# Altium PCB PCB_Output register_2021-10-31.pcbdoc
Units mm, origin at the board's own origin, x right, y up, seen from the top; angles counter-clockwise.
Board outline 124.59 x 83.95 mm, 2 copper layers (Top Layer, Bottom Layer); 27 components, 33 nets, 96 pads, 16 vias.
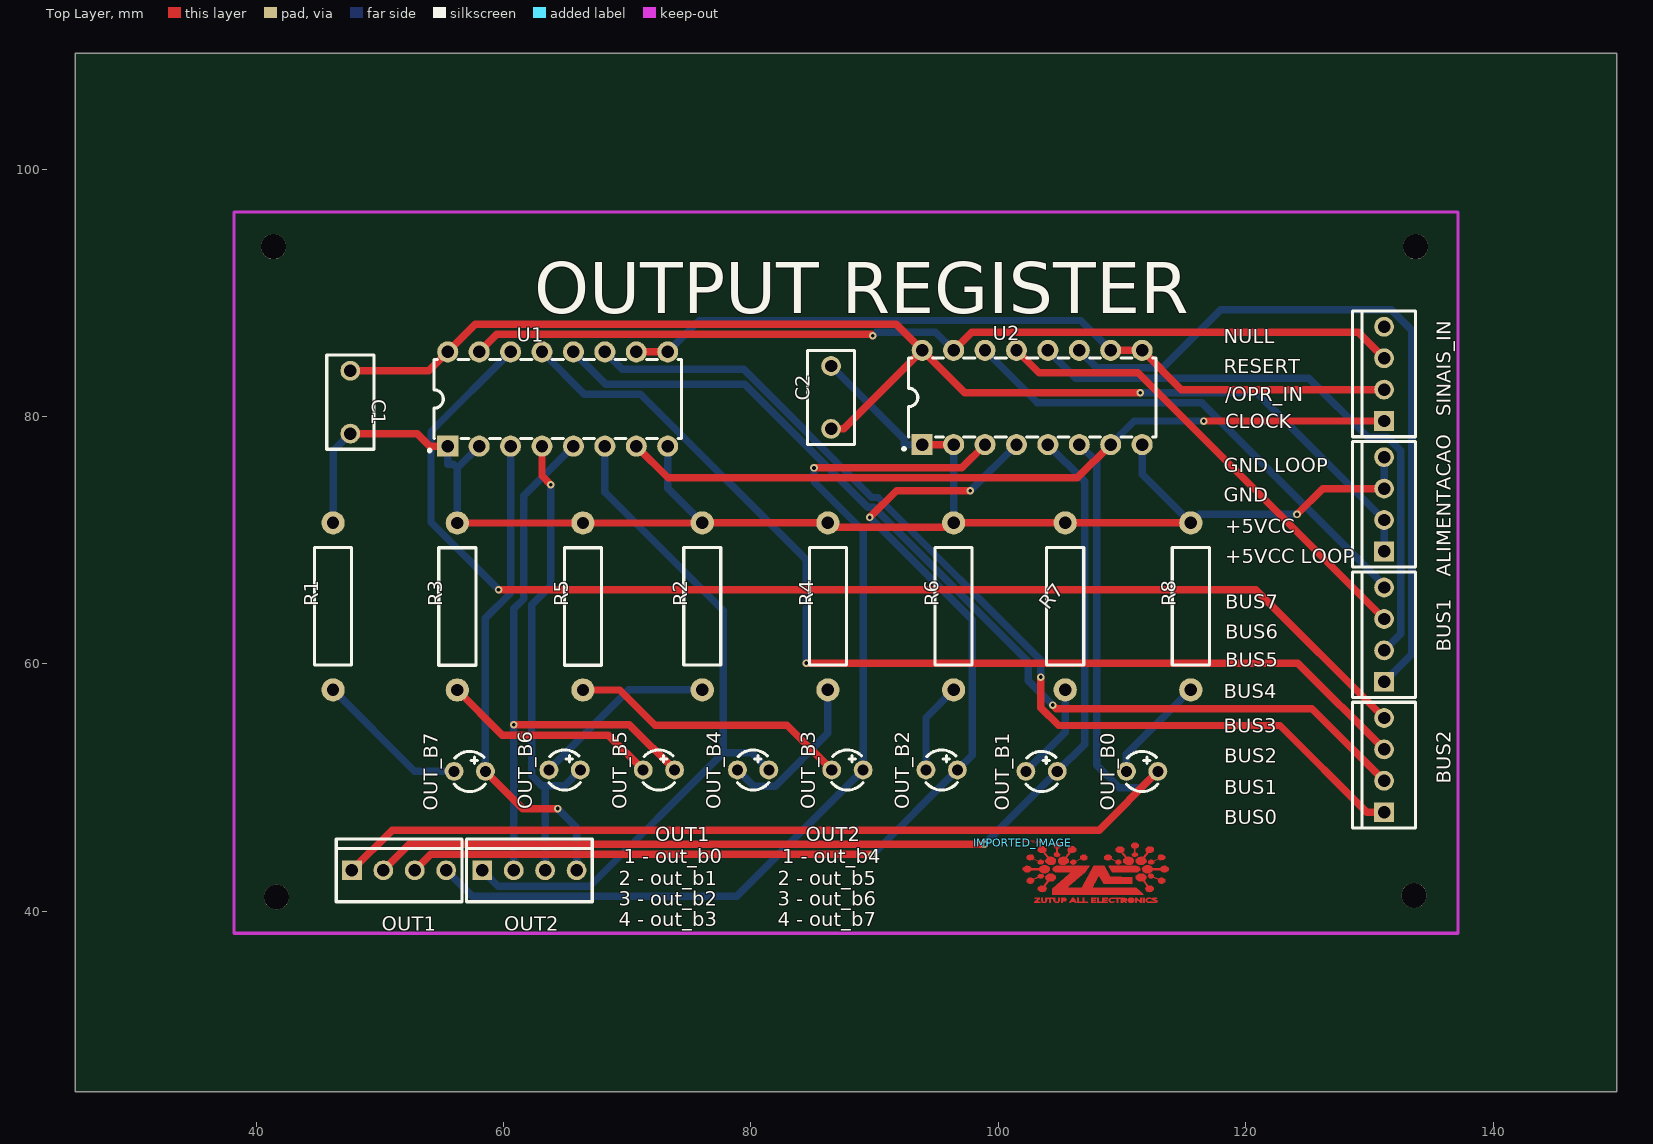
[diagram p0: Top Layer view]
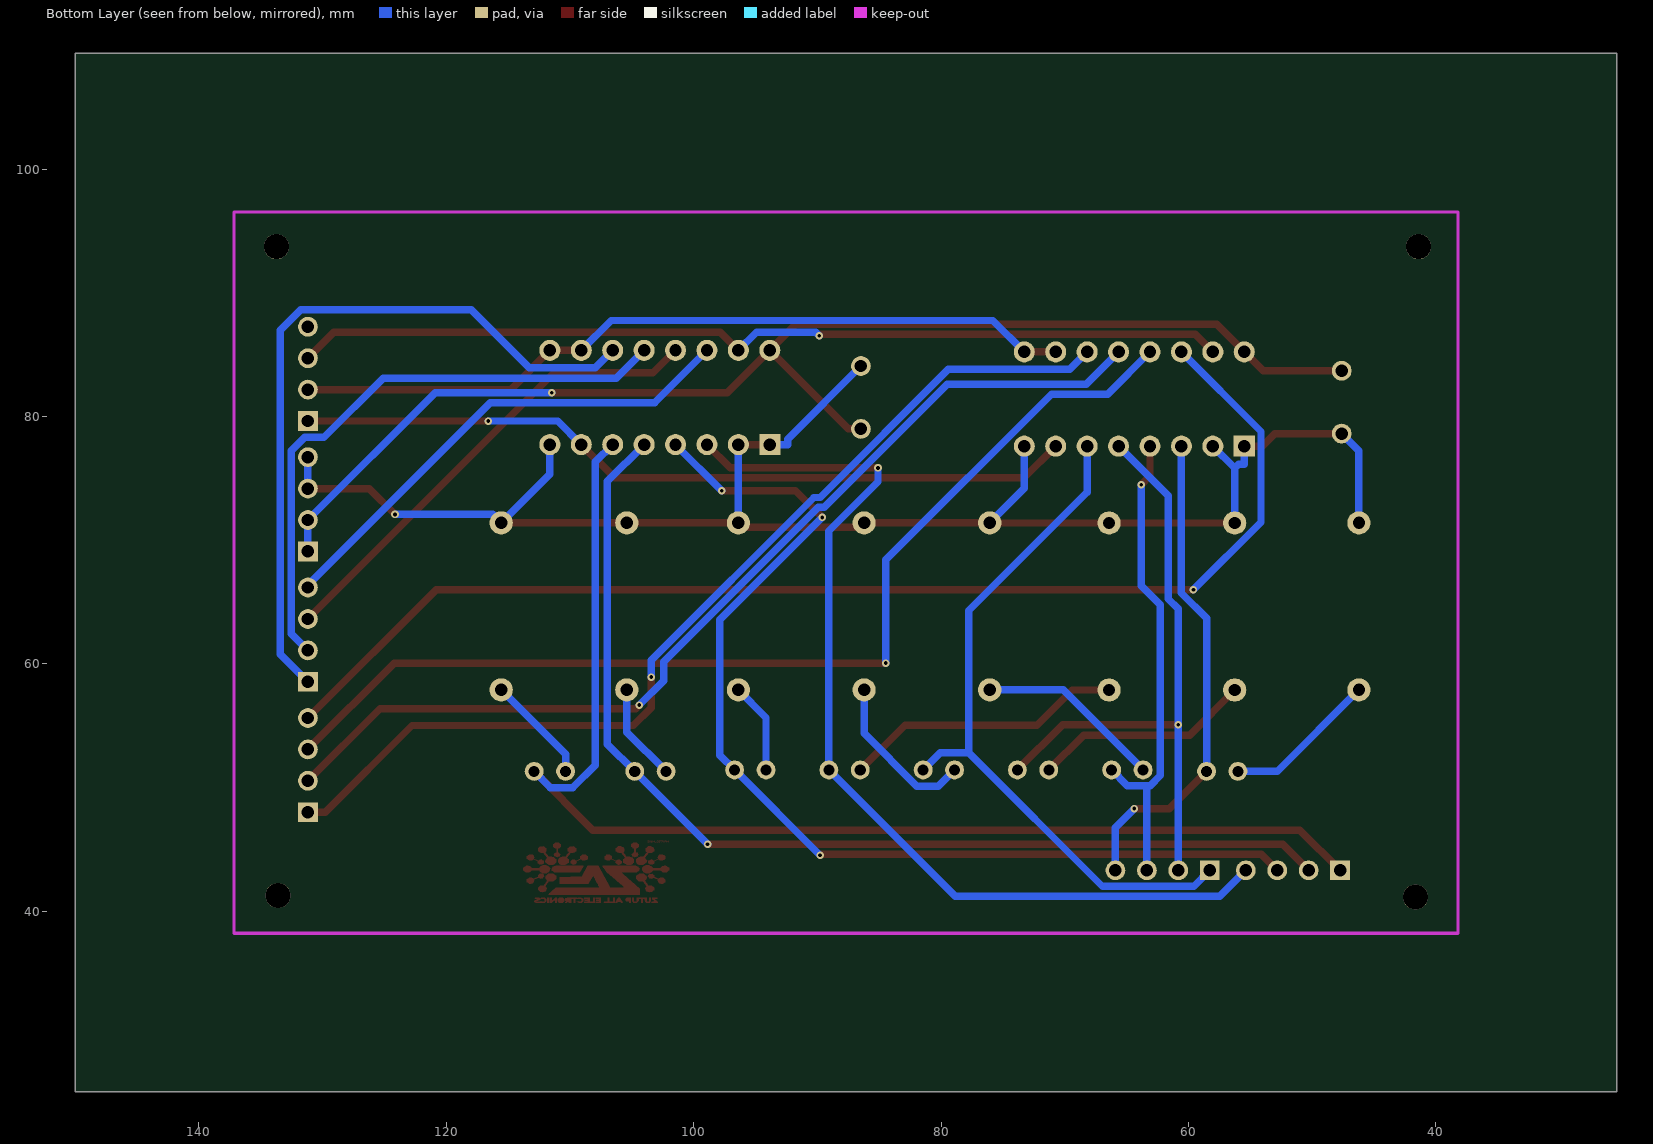
[diagram p1: Bottom Layer view, seen from below]

## Layer stack, top to bottom
Top Layer: signal copper (thickness not stored)
Dielectric: dielectric 0.32, FR-4, Dk 4.8
Bottom Layer: signal copper (thickness not stored)

## Board outline
149.987,25.4 25.4,25.4 25.4,109.347 149.987,109.347

## Components (designator, comment, footprint, x,y, rotation, side; value= is the part's Value field where it differs from the comment)
ALIMENTACAO "ALIM." HDR-TH_4P-P2.54-D1.0 131.191,72.898 r90 top
BUS1 "BUS1" HDR-TH_4P-P2.54-D1.0 131.191,62.357 r90 top
BUS2 "BUS2" HDR-TH_4P-P2.54-D1.0 131.191,51.816 r90 top
C1 "100nF 63V poli7" CAP-TH_L7.6-W3.8-P5.08-D0.51 47.625,81.153 r270 top
C2 "100nF 63V poli" CAP-TH_L7.6-W3.8-P5.08-D0.51 86.487,81.534 r90 top
IMPORTED_IMAGE "IMPORTED_IMAGE" IMPORTED_IMAGE 101.999,45.529 r0 top
OUT1 "OUT1" HDR-TH_4P-P2.54-D1.0 51.562,43.307 r0 top
OUT2 "OUT2" HDR-TH_4P-P2.54-D1.0 62.103,43.307 r0 top
OUT_B0 "VERDE" LED-TH_BD3.0-P2.54-RD-GREEN 111.633,51.308 r0 top
OUT_B1 "VERDE" LED-TH_BD3.0-P2.54-RD-GREEN 103.505,51.308 r0 top
OUT_B2 "VERDE" LED-TH_BD3.0-P2.54-RD-GREEN 95.428,51.425 r0 top
OUT_B3 "VERDE" LED-TH_BD3.0-P2.54-RD-GREEN 87.808,51.425 r0 top
OUT_B4 "VERDE" LED-TH_BD3.0-P2.54-RD-GREEN 80.188,51.425 r0 top
OUT_B5 "VERDE" LED-TH_BD3.0-P2.54-RD-GREEN 72.568,51.425 r0 top
OUT_B6 "VERDE" LED-TH_BD3.0-P2.54-RD-GREEN 64.948,51.425 r0 top
OUT_B7 "VERDE" LED-TH_BD3.0-P2.54-RD-GREEN 57.277,51.308 r0 top
R1 "150" RES-TH_BD3.0-L9.5-P13.50-D0.6 46.228,64.643 r90 top
R2 "150" RES-TH_BD3.0-L9.5-P13.50-D0.6 76.073,64.643 r90 top
R3 "150" RES-TH_BD3.0-L9.5-P13.50-D0.6 56.271,64.637 r90 top
R4 "150" RES-TH_BD3.0-L9.5-P13.50-D0.6 86.233,64.643 r90 top
R5 "150" RES-TH_BD3.0-L9.5-P13.50-D0.6 66.431,64.637 r90 top
R6 "150" RES-TH_BD3.0-L9.5-P13.50-D0.6 96.393,64.643 r90 top
R7 "150" RES-TH_BD3.0-L9.5-P13.50-D0.6 105.41,64.643 r90 top
R8 "150" RES-TH_BD3.0-L9.5-P13.50-D0.6 115.57,64.643 r90 top
SINAIS_IN "SINAIS IN" HDR-TH_4P-P2.54-D1.0 131.191,83.439 r90 top
U1 "SN74LS173AN" PDIP-16_L19.7-W6.6-P2.54-LS7.6-BL 64.389,81.406 r0 top
U2 "SN74LS173AN" PDIP-16_L19.7-W6.6-P2.54-LS7.6-BL 102.743,81.533 r0 top

## Footprints (in the part's own frame and the unit in brackets; to place one, negate y for a bottom-side part, rotate by r counter-clockwise, add the part's x,y. Pads: shape width x height; smd on the part's side, far side on the other; paste and mask are expansions set on the pad)
CAP-TH_L7.6-W3.8-P5.08-D0.51 [mm]
  round 1.6 hole 1: 1(-2.54,0) 2(2.54,0)
  silkscreen extent -3.81,-1.91 3.81,1.91
HDR-TH_4P-P2.54-D1.0 [mm]
  rect 1.6x1.6 hole 1: 1(-3.81,0)
  round 1.6 hole 1: 2(-1.27,0) 3(1.27,0) 4(3.81,0)
  silkscreen extent -5.08,-2.54 5.08,2.54
IMPORTED_IMAGE [mm]
  Top Layer region: 1.407,-4.796 1.424,-4.835 0.917,-4.835 0.917,-4.805 0.918,-4.801 0.92,-4.796 0.923,-4.791 0.927,-4.784 0.932,-4.777 0.939,-4.769 0.946,-4.761 0.954,-4.752 0.963,-4.742 0.972,-4.732 0.983,-4.722 0.994,-4.711 1.005,-4.7 1.017,-4.689 1.03,-4.678 1.042,-4.667 1.069,-4.644 1.092,-4.623 1.112,-4.605 1.128,-4.589 1.141,-4.575 1.151,-4.563 1.157,-4.553 1.16,-4.545 1.159,-4.538 1.155,-4.533 1.148,-4.529 1.138,-4.525 1.124,-4.523 1.107,-4.522 1.087,-4.521 1.063,-4.521 0.959,-4.521 0.959,-4.427 1.376,-4.427 1.376,-4.471 1.375,-4.476 1.374,-4.482 1.371,-4.489 1.368,-4.496 1.363,-4.504 1.358,-4.512 1.352,-4.521 1.345,-4.53 1.338,-4.54 1.33,-4.55 1.321,-4.56 1.312,-4.57 1.302,-4.58 1.293,-4.59 1.282,-4.6 1.272,-4.609 1.249,-4.63 1.229,-4.648 1.212,-4.664 1.199,-4.678 1.188,-4.69 1.181,-4.701 1.176,-4.71 1.175,-4.717 1.177,-4.723 1.182,-4.728 1.19,-4.733 1.202,-4.736 1.216,-4.739 1.234,-4.742 1.255,-4.744 1.279,-4.746 1.39,-4.756
  Top Layer region: 2.59,-4.835 2.525,-4.765 2.46,-4.695 2.46,-4.427 2.627,-4.427 2.627,-4.737 2.714,-4.777 2.835,-4.702 2.835,-4.427 2.96,-4.427 2.96,-4.713 2.917,-4.774 2.874,-4.835
  Top Layer region: 2.251,-4.678 2.251,-4.835 2.126,-4.835 2.126,-4.521 1.97,-4.521 1.946,-4.634 1.94,-4.657 1.933,-4.681 1.924,-4.704 1.915,-4.726 1.904,-4.747 1.894,-4.764 1.883,-4.779 1.873,-4.791 1.824,-4.835 1.546,-4.835 1.459,-4.713 1.459,-4.427 1.584,-4.427 1.584,-4.702 1.706,-4.777 1.793,-4.737 1.793,-4.427 2.418,-4.427 2.418,-4.521 2.251,-4.521
  Top Layer region: 7.588,-4.835 7.588,-4.527 7.093,-4.527 7.044,-4.624 7.067,-4.679 7.073,-4.691 7.082,-4.702 7.092,-4.714 7.103,-4.724 7.116,-4.734 7.129,-4.742 7.143,-4.749 7.157,-4.754 7.223,-4.773 7.271,-4.743 7.32,-4.713 7.381,-4.742 7.442,-4.772 7.379,-4.803 7.372,-4.806 7.364,-4.809 7.355,-4.812 7.345,-4.815 7.335,-4.818 7.324,-4.82 7.312,-4.823 7.299,-4.825 7.287,-4.827 7.274,-4.829 7.26,-4.83 7.247,-4.832 7.234,-4.833 7.221,-4.834 7.208,-4.834 7.195,-4.834 7.073,-4.835 6.921,-4.731 6.921,-4.524 7.106,-4.427 7.321,-4.427 7.371,-4.464 7.421,-4.502 7.421,-4.427 7.88,-4.427 7.88,-4.521 7.713,-4.521 7.713,-4.835
  Top Layer region: 5.503,-4.835 5.503,-4.427 5.92,-4.427 5.92,-4.521 5.628,-4.521 5.628,-4.584 5.878,-4.584 5.878,-4.678 5.628,-4.678 5.628,-4.741 5.92,-4.741 5.92,-4.835
  Top Layer region: 9.089,-4.835 9.089,-4.427 9.193,-4.427 9.327,-4.544 9.461,-4.662 9.464,-4.427 9.589,-4.427 9.589,-4.835 9.47,-4.835 9.214,-4.601 9.214,-4.835
  Top Layer region: 3.21,-4.79 3.21,-4.835 3.085,-4.835 3.085,-4.427 3.207,-4.427 3.237,-4.427 3.265,-4.428 3.291,-4.43 3.316,-4.432 3.339,-4.435 3.36,-4.439 3.38,-4.444 3.399,-4.449 3.416,-4.456 3.432,-4.463 3.446,-4.471 3.46,-4.48 3.473,-4.489 3.484,-4.5 3.495,-4.512 3.505,-4.525 3.547,-4.584 3.461,-4.704 3.336,-4.725 3.21,-4.746 hole: 1051991.909,409386.215 1051991.909,408735.213 1051991.909,408735.213 1053441.487,408945.525 1053441.487,408945.525 1053580.933,409491.371 1053580.933,409491.371 1053720.887,410037.217 1053720.887,410037.217 1051991.909,410037.217 1051991.909,410037.217 1051991.909,409386.215
  Top Layer region: 6.003,-4.835 6.003,-4.427 6.129,-4.427 6.129,-4.741 6.379,-4.741 6.379,-4.835
  Top Layer region: 8.94,-4.786 8.874,-4.835 8.594,-4.835 8.463,-4.736 8.463,-4.542 8.532,-4.484 8.601,-4.427 8.867,-4.427 8.932,-4.482 8.951,-4.499 8.968,-4.517 8.981,-4.536 8.993,-4.556 9.002,-4.576 9.009,-4.597 9.013,-4.618 9.015,-4.638 9.014,-4.659 9.011,-4.679 9.005,-4.699 8.997,-4.718 8.986,-4.737 8.973,-4.754 8.958,-4.77 hole: 1106394.645,407959.751 1107138.865,407549.795 1107138.865,407549.795 1107940.235,407872.375 1107940.235,407872.375 1108741.351,408195.463 1108741.351,408195.463 1108612.319,409037.727 1108612.319,409037.727 1108482.779,409880.245 1108482.779,409880.245 1107350.955,409978.035 1107350.955,409978.035 1106219.131,410076.587 1106219.131,410076.587 1105934.651,409222.893 1105934.651,409222.893 1105650.171,408369.707 1105650.171,408369.707 1106394.645,407959.751
  Top Layer region: 3.904,-4.788 3.88,-4.835 3.743,-4.835 3.768,-4.791 3.8,-4.733 3.851,-4.642 3.972,-4.427 4.112,-4.427 4.254,-4.678 4.315,-4.787 4.343,-4.835 4.169,-4.835 4.169,-4.741 3.928,-4.741 hole: 1059912.899,408938.159 1059912.899,408467.243 1059912.899,408467.243 1060747.035,408467.243 1060747.035,408467.243 1060747.035,409409.329 1060747.035,409409.329 1059912.899,409409.329 1059912.899,409409.329 1059912.899,408938.159
  Top Layer region: 7.921,-4.835 7.921,-4.427 8.219,-4.427 8.38,-4.492 8.38,-4.674 8.289,-4.716 8.335,-4.75 8.352,-4.766 8.367,-4.782 8.376,-4.797 8.38,-4.81 8.379,-4.817 8.375,-4.823 8.369,-4.828 8.362,-4.831 8.352,-4.834 8.342,-4.835 8.33,-4.835 8.317,-4.833 8.304,-4.831 8.29,-4.828 8.276,-4.823 8.262,-4.818 8.249,-4.812 8.236,-4.805 8.224,-4.797 8.213,-4.788 8.19,-4.769 8.166,-4.755 8.143,-4.744 8.125,-4.741 8.088,-4.741 8.088,-4.835 hole: 1100770.069,409409.329 1100770.069,408735.213 1100770.069,408735.213 1101499.811,408840.877 1101499.811,408840.877 1102229.553,408946.795 1102229.553,408946.795 1102229.553,409871.355 1102229.553,409871.355 1101499.811,409977.019 1101499.811,409977.019 1100770.069,410083.191 1100770.069,410083.191 1100770.069,409409.329
  Top Layer region: 4.794,-4.788 4.794,-4.835 4.378,-4.835 4.378,-4.427 4.503,-4.427 4.503,-4.741 4.794,-4.741
  Top Layer region: 9.672,-4.835 9.672,-4.427 9.839,-4.427 9.839,-4.835
  Top Layer region: 4.836,-4.835 4.836,-4.427 4.961,-4.427 4.961,-4.737 5.094,-4.747 5.226,-4.756 5.26,-4.835
  Top Layer region: 6.837,-4.788 6.837,-4.835 6.42,-4.835 6.42,-4.427 6.837,-4.427 6.837,-4.521 6.587,-4.521 6.587,-4.584 6.844,-4.584 6.827,-4.623 6.81,-4.662 6.699,-4.672 6.587,-4.682 6.587,-4.741 6.837,-4.741
  Top Layer region: 10.842,-4.786 10.793,-4.83 10.419,-4.829 10.044,-4.828 9.922,-4.736 9.922,-4.542 9.991,-4.484 10.06,-4.427 10.329,-4.427 10.422,-4.511 10.397,-4.53 10.371,-4.549 10.247,-4.531 10.122,-4.512 10.086,-4.556 10.071,-4.577 10.059,-4.602 10.051,-4.629 10.048,-4.653 10.048,-4.707 10.134,-4.742 10.22,-4.776 10.326,-4.71 10.355,-4.732 10.359,-4.734 10.364,-4.736 10.371,-4.738 10.379,-4.741 10.389,-4.743 10.399,-4.745 10.411,-4.747 10.424,-4.749 10.438,-4.751 10.452,-4.752 10.467,-4.754 10.483,-4.756 10.499,-4.757 10.515,-4.758 10.532,-4.759 10.549,-4.76 10.715,-4.766 10.736,-4.74 10.757,-4.714 10.614,-4.679 10.472,-4.644 10.449,-4.598 10.425,-4.552 10.474,-4.458 10.57,-4.439 10.617,-4.432 10.661,-4.429 10.702,-4.429 10.739,-4.433 10.771,-4.441 10.798,-4.451 10.817,-4.465 10.829,-4.482 10.847,-4.521 10.589,-4.521 10.589,-4.545 10.59,-4.548 10.592,-4.551 10.595,-4.554 10.599,-4.558 10.605,-4.561 10.611,-4.565 10.618,-4.569 10.626,-4.573 10.635,-4.577 10.645,-4.581 10.655,-4.586 10.666,-4.59 10.677,-4.594 10.689,-4.598 10.702,-4.602 10.714,-4.605 10.839,-4.641 10.891,-4.741
  Top Layer region: 2.376,-4.176 2.378,-3.948 2.379,-3.72 3.106,-3.077 3.252,-2.947 3.388,-2.825 3.512,-2.713 3.62,-2.615 3.709,-2.533 3.776,-2.469 3.819,-2.427 3.834,-2.41 3.836,-2.386 2.599,-2.386 2.514,-2.315 2.496,-2.3 2.478,-2.283 2.461,-2.264 2.445,-2.245 2.43,-2.226 2.417,-2.208 2.407,-2.191 2.4,-2.176 2.372,-2.107 2.439,-2.009 2.506,-1.912 2.689,-1.856 4.034,-1.854 4.171,-1.854 4.304,-1.854 4.432,-1.854 4.556,-1.855 4.673,-1.855 4.784,-1.856 4.888,-1.857 4.983,-1.858 5.07,-1.859 5.148,-1.86 5.215,-1.861 5.272,-1.862 5.317,-1.864 5.351,-1.865 5.371,-1.867 5.378,-1.869 5.376,-1.874 5.371,-1.884 5.362,-1.9 5.35,-1.919 5.335,-1.943 5.318,-1.97 5.299,-2 5.278,-2.032 5.255,-2.067 5.23,-2.103 5.214,-2.128 5.049,-2.37 4.317,-2.992 4.17,-3.117 4.033,-3.234 3.909,-3.341 3.8,-3.435 3.711,-3.513 3.643,-3.573 3.6,-3.612 3.585,-3.627 3.588,-3.629 3.597,-3.63 3.616,-3.632 3.642,-3.634 3.676,-3.635 3.717,-3.637 3.764,-3.638 3.817,-3.639 3.874,-3.64 3.937,-3.641 4.003,-3.641 4.058,-3.642 4.116,-3.642 4.16,-3.642 4.734,-3.642 5.233,-2.747 5.733,-1.853 6.151,-1.853 6.57,-1.852 6.819,-2.3 7.068,-2.747 7.953,-2.756 8.838,-2.764 8.838,-3.296 6.517,-3.296 6.337,-2.983 6.3,-2.919 6.265,-2.861 6.231,-2.807 6.201,-2.761 6.175,-2.722 6.153,-2.693 6.137,-2.675 6.127,-2.669 6.117,-2.679 6.098,-2.708 6.072,-2.753 6.039,-2.812 6,-2.881 5.958,-2.959 5.914,-3.043 5.868,-3.13 5.823,-3.217 5.78,-3.303 5.739,-3.384 5.703,-3.457 5.672,-3.521 5.649,-3.572 5.634,-3.608 5.628,-3.627 5.635,-3.628 5.656,-3.63 5.69,-3.631 5.736,-3.632 5.794,-3.633 5.863,-3.634 5.955,-3.636 6.06,-3.637 6.177,-3.638 6.305,-3.639 6.443,-3.639 6.572,-3.64 6.707,-3.641 6.848,-3.641 6.995,-3.641 7.146,-3.642 7.301,-3.642 7.392,-3.642 9.155,-3.642 9.434,-3.883 9.491,-3.932 9.543,-3.978 9.59,-4.022 9.632,-4.06 9.666,-4.094 9.692,-4.12 9.708,-4.139 9.714,-4.15 9.714,-4.176
  Top Layer region: 1.701,-3.943 1.58,-3.99 1.488,-3.97 1.468,-3.964 1.445,-3.956 1.421,-3.947 1.396,-3.936 1.371,-3.924 1.346,-3.911 1.324,-3.897 1.303,-3.884 1.209,-3.819 1.209,-3.619 1.295,-3.536 1.382,-3.453 1.663,-3.453 1.807,-3.261 1.951,-3.069 1.867,-2.962 1.784,-2.856 1.81,-2.75 1.836,-2.644 1.945,-2.562 2.054,-2.48 2.425,-2.48 2.546,-2.572 2.668,-2.664 2.668,-2.919 2.549,-3.019 2.429,-3.12 2.254,-3.124 2.078,-3.127 1.943,-3.317 1.809,-3.507 1.869,-3.604 1.93,-3.7 1.876,-3.798 1.823,-3.896
  Top Layer region: 10.214,-3.989 10.095,-3.942 9.976,-3.896 9.922,-3.798 9.868,-3.7 9.93,-3.603 9.991,-3.505 9.709,-3.122 9.372,-3.122 9.251,-3.021 9.13,-2.919 9.13,-2.664 9.252,-2.572 9.374,-2.48 9.744,-2.48 9.852,-2.561 9.959,-2.642 9.986,-2.735 10.013,-2.828 9.932,-2.951 9.852,-3.074 10.136,-3.453 10.417,-3.453 10.503,-3.536 10.589,-3.619 10.589,-3.79 10.507,-3.87 10.424,-3.949
  Top Layer region: 0.512,-3.296 0.292,-3.166 0.292,-2.971 0.382,-2.898 0.473,-2.826 0.69,-2.826 0.776,-2.871 0.861,-2.916 1.035,-2.837 1.209,-2.759 1.209,-2.61 1.277,-2.559 1.345,-2.508 1.475,-2.518 1.605,-2.527 1.66,-2.615 1.716,-2.703 1.651,-2.778 1.586,-2.852 1.504,-2.872 1.421,-2.892 1.332,-2.856 1.243,-2.82 1.059,-2.893 0.876,-2.966 0.899,-3.02 0.922,-3.074 0.795,-3.257 0.728,-3.277 0.713,-3.281 0.696,-3.285 0.677,-3.288 0.658,-3.291 0.639,-3.293 0.62,-3.295 0.602,-3.296 0.586,-3.296
  Top Layer region: 11.397,-3.231 11.287,-3.296 11.213,-3.296 11.196,-3.296 11.178,-3.295 11.16,-3.293 11.14,-3.291 11.121,-3.288 11.103,-3.285 11.086,-3.281 11.071,-3.277 11.003,-3.257 10.877,-3.074 10.922,-2.966 10.739,-2.893 10.556,-2.82 10.467,-2.856 10.378,-2.892 10.295,-2.872 10.212,-2.852 10.15,-2.78 10.087,-2.709 10.116,-2.649 10.122,-2.637 10.13,-2.623 10.138,-2.61 10.147,-2.596 10.157,-2.583 10.166,-2.571 10.175,-2.56 10.184,-2.551 10.224,-2.512 10.458,-2.512 10.524,-2.561 10.589,-2.61 10.589,-2.759 10.764,-2.837 10.938,-2.916 11.108,-2.826 11.314,-2.826 11.41,-2.894 11.507,-2.962 11.507,-3.166
  Top Layer region: 9.885,-2.449 9.776,-2.378 9.667,-2.307 9.643,-2.175 9.62,-2.042 9.762,-1.879 9.91,-1.83 9.937,-1.821 9.962,-1.814 9.973,-1.81 9.984,-1.807 9.994,-1.805 10.004,-1.802 10.013,-1.8 10.022,-1.798 10.03,-1.797 10.039,-1.796 10.047,-1.795 10.055,-1.794 10.063,-1.794 10.071,-1.794 10.079,-1.795 10.087,-1.795 10.096,-1.797 10.104,-1.798 10.113,-1.8 10.123,-1.802 10.132,-1.804 10.143,-1.807 10.153,-1.81 10.165,-1.813 10.19,-1.82 10.218,-1.829 10.375,-1.879 10.442,-1.975 10.508,-2.072 11.131,-2.072 11.131,-2.03 11.132,-2.024 11.133,-2.018 11.135,-2.012 11.138,-2.006 11.141,-1.999 11.145,-1.993 11.149,-1.987 11.155,-1.981 11.161,-1.974 11.167,-1.968 11.174,-1.962 11.182,-1.956 11.19,-1.95 11.198,-1.944 11.207,-1.938 11.217,-1.932 11.226,-1.926 11.237,-1.921 11.247,-1.916 11.258,-1.91 11.269,-1.905 11.281,-1.9 11.293,-1.896 11.305,-1.891 11.317,-1.887 11.33,-1.883 11.343,-1.88 11.355,-1.876 11.368,-1.873 11.382,-1.87 11.395,-1.868 11.408,-1.866 11.533,-1.847 11.666,-1.931 11.799,-2.015 11.799,-2.232 11.696,-2.309 11.594,-2.386 11.314,-2.386 11.223,-2.322 11.187,-2.295 11.158,-2.268 11.139,-2.245 11.131,-2.228 11.131,-2.198 10.508,-2.198 10.444,-2.291 10.38,-2.384 10.3,-2.416 10.22,-2.449
  Top Layer region: 1.579,-2.449 1.499,-2.416 1.418,-2.384 1.354,-2.291 1.29,-2.198 0.703,-2.198 0.493,-2.386 0.205,-2.386 0.102,-2.309 0,-2.232 0,-2.015 0.265,-1.847 0.39,-1.866 0.443,-1.876 0.494,-1.891 0.54,-1.91 0.582,-1.932 0.617,-1.956 0.644,-1.981 0.661,-2.006 0.667,-2.03 0.667,-2.072 1.29,-2.072 1.357,-1.976 1.423,-1.879 1.571,-1.831 1.599,-1.822 1.623,-1.814 1.635,-1.81 1.645,-1.807 1.655,-1.805 1.665,-1.802 1.674,-1.8 1.683,-1.798 1.692,-1.797 1.7,-1.796 1.708,-1.795 1.716,-1.794 1.724,-1.794 1.732,-1.794 1.74,-1.795 1.748,-1.795 1.757,-1.796 1.765,-1.798 1.774,-1.799 1.783,-1.801 1.793,-1.804 1.803,-1.806 1.814,-1.809 1.825,-1.812 1.85,-1.82 1.878,-1.829 2.032,-1.877 2.168,-2.023 2.168,-2.201 2.042,-2.384 1.962,-2.416 1.882,-2.449
  Top Layer region: 9.373,-2.313 9.283,-2.386 7.215,-2.386 7.068,-2.146 7.038,-2.097 7.011,-2.051 6.986,-2.008 6.964,-1.969 6.946,-1.935 6.932,-1.909 6.924,-1.89 6.921,-1.879 6.921,-1.852 9.176,-1.852 9.412,-1.944 9.438,-1.995 9.443,-2.007 9.448,-2.022 9.452,-2.04 9.456,-2.06 9.459,-2.08 9.462,-2.101 9.463,-2.123 9.464,-2.143 9.464,-2.241
  Top Layer region: 2.224,-1.789 2.209,-1.79 2.078,-1.79 1.958,-1.699 1.839,-1.609 1.809,-1.52 1.779,-1.431 1.864,-1.315 1.949,-1.198 1.799,-1.007 1.649,-0.816 1.414,-0.816 1.209,-0.662 1.209,-0.564 1.21,-0.544 1.213,-0.522 1.217,-0.499 1.222,-0.477 1.229,-0.456 1.236,-0.436 1.245,-0.419 1.253,-0.404 1.298,-0.342 1.389,-0.314 1.409,-0.309 1.432,-0.303 1.456,-0.298 1.481,-0.294 1.507,-0.29 1.531,-0.287 1.555,-0.285 1.576,-0.285 1.671,-0.283 1.774,-0.36 1.876,-0.437 1.876,-0.678 1.828,-0.714 1.781,-0.75 2.067,-1.115 2.17,-1.123 2.192,-1.125 2.217,-1.128 2.244,-1.131 2.271,-1.134 2.298,-1.138 2.324,-1.141 2.348,-1.145 2.37,-1.148 2.467,-1.164 2.568,-1.246 2.668,-1.328 2.667,-1.457 2.666,-1.585 2.594,-1.652 2.585,-1.661 2.576,-1.669 2.566,-1.677 2.556,-1.684 2.546,-1.692 2.536,-1.699 2.526,-1.706 2.515,-1.712 2.504,-1.718 2.493,-1.724 2.482,-1.73 2.471,-1.736 2.46,-1.741 2.448,-1.746 2.436,-1.751 2.424,-1.755 2.412,-1.759 2.4,-1.763 2.387,-1.767 2.374,-1.77 2.362,-1.773 2.349,-1.776 2.335,-1.779 2.322,-1.781 2.308,-1.783 2.295,-1.785 2.281,-1.786 2.267,-1.787 2.253,-1.788 2.238,-1.789
  Top Layer region: 8.381,-1.79 8.109,-1.606 8.109,-1.325 8.18,-1.266 8.251,-1.207 8.098,-1.012 7.945,-0.816 7.724,-0.816 7.614,-0.751 7.504,-0.686 7.504,-0.437 7.612,-0.356 7.719,-0.275 8.025,-0.312 8.098,-0.379 8.171,-0.446 8.171,-0.678 8.078,-0.748 8.218,-0.939 8.357,-1.13 8.492,-1.13 8.506,-1.13 8.521,-1.131 8.537,-1.132 8.553,-1.133 8.569,-1.135 8.585,-1.137 8.602,-1.139 8.619,-1.141 8.635,-1.144 8.651,-1.147 8.667,-1.15 8.682,-1.153 8.697,-1.157 8.711,-1.16 8.724,-1.164 8.735,-1.168 8.845,-1.205 8.904,-1.292 8.916,-1.311 8.927,-1.332 8.937,-1.354 8.946,-1.377 8.953,-1.399 8.959,-1.421 8.962,-1.442 8.964,-1.46 8.962,-1.478 8.959,-1.498 8.953,-1.52 8.946,-1.543 8.937,-1.566 8.927,-1.588 8.916,-1.609 8.904,-1.628 8.845,-1.715 8.735,-1.752 8.724,-1.756 8.711,-1.76 8.697,-1.763 8.683,-1.767 8.669,-1.77 8.653,-1.773 8.638,-1.776 8.622,-1.778 8.606,-1.781 8.591,-1.783 8.575,-1.785 8.56,-1.787 8.545,-1.788 8.53,-1.789 8.517,-1.789 8.504,-1.79
  Top Layer region: 3.553,-1.698 3.417,-1.79 3.295,-1.79 3.282,-1.789 3.268,-1.789 3.254,-1.788 3.239,-1.787 3.223,-1.785 3.208,-1.783 3.192,-1.781 3.176,-1.778 3.161,-1.776 3.145,-1.773 3.13,-1.77 3.115,-1.767 3.101,-1.763 3.088,-1.76 3.075,-1.756 3.063,-1.752 2.954,-1.715 2.894,-1.628 2.882,-1.608 2.87,-1.588 2.861,-1.568 2.853,-1.548 2.847,-1.528 2.842,-1.507 2.839,-1.487 2.838,-1.466 2.838,-1.446 2.84,-1.425 2.843,-1.405 2.848,-1.384 2.855,-1.364 2.863,-1.343 2.873,-1.323 2.885,-1.302 2.935,-1.22 3.164,-1.13 3.302,-1.13 3.439,-1.129 3.579,-0.938 3.719,-0.747 3.627,-0.678 3.627,-0.467 3.716,-0.342 3.807,-0.314 3.827,-0.309 3.85,-0.303 3.874,-0.298 3.899,-0.294 3.925,-0.29 3.949,-0.287 3.973,-0.285 3.994,-0.285 4.09,-0.283 4.192,-0.36 4.294,-0.437 4.294,-0.686 4.184,-0.751 4.074,-0.816 3.854,-0.816 3.701,-1.012 3.548,-1.207 3.619,-1.266 3.69,-1.325 3.69,-1.606
  Top Layer region: 9.589,-1.79 9.56,-1.789 9.532,-1.787 9.504,-1.785 9.477,-1.781 9.45,-1.776 9.424,-1.77 9.399,-1.763 9.374,-1.755 9.351,-1.746 9.327,-1.736 9.305,-1.724 9.283,-1.712 9.262,-1.699 9.242,-1.684 9.223,-1.669 9.204,-1.652 9.132,-1.585 9.131,-1.457 9.13,-1.328 9.231,-1.246 9.332,-1.164 9.429,-1.148 9.451,-1.145 9.475,-1.141 9.501,-1.138 9.528,-1.134 9.555,-1.131 9.581,-1.128 9.606,-1.125 9.629,-1.123 9.731,-1.115 9.875,-0.932 10.018,-0.75 9.922,-0.678 9.922,-0.437 10.03,-0.356 10.137,-0.275 10.444,-0.312 10.517,-0.379 10.589,-0.446 10.589,-0.662 10.385,-0.816 10.149,-0.816 9.85,-1.198 9.935,-1.315 10.019,-1.431 9.99,-1.52 9.96,-1.609 9.84,-1.699 9.72,-1.79
  Top Layer region: 7.759,-1.763 7.672,-1.743 7.586,-1.722 7.52,-1.646 7.454,-1.57 7.475,-1.529 7.496,-1.488 7.313,-1.415 7.13,-1.342 7.01,-1.417 6.754,-1.422 6.67,-1.366 6.587,-1.309 6.587,-1.088 6.656,-1.031 6.725,-0.973 7.004,-0.973 7.087,-1.036 7.171,-1.099 7.171,-1.284 7.347,-1.363 7.524,-1.442 7.564,-1.412 7.604,-1.381 7.832,-1.381 7.897,-1.431 7.963,-1.48 7.963,-1.662
  Top Layer region: 4.067,-1.755 4.058,-1.754 4.05,-1.754 4.041,-1.752 4.032,-1.751 4.022,-1.748 4.013,-1.746 4.003,-1.743 3.994,-1.739 3.983,-1.735 3.973,-1.731 3.962,-1.726 3.951,-1.721 3.94,-1.715 3.928,-1.709 3.836,-1.66 3.836,-1.48 3.901,-1.431 3.967,-1.381 4.08,-1.381 4.104,-1.382 4.128,-1.384 4.151,-1.386 4.172,-1.39 4.192,-1.394 4.209,-1.399 4.223,-1.405 4.234,-1.41 4.273,-1.439 4.451,-1.36 4.628,-1.281 4.628,-1.099 4.794,-0.973 5.059,-0.973 5.135,-1.025 5.211,-1.077 5.211,-1.309 5.128,-1.366 5.045,-1.422 4.789,-1.417 4.668,-1.342 4.482,-1.416 4.295,-1.491 4.318,-1.545 4.341,-1.6 4.236,-1.679 4.225,-1.687 4.214,-1.695 4.203,-1.703 4.193,-1.709 4.183,-1.716 4.173,-1.722 4.164,-1.727 4.155,-1.732 4.145,-1.736 4.136,-1.74 4.128,-1.744 4.119,-1.747 4.11,-1.749 4.102,-1.751 4.093,-1.753 4.084,-1.754 4.076,-1.754
  Top Layer region: 1.618,-1.689 1.568,-1.727 1.303,-1.727 1.251,-1.68 1.199,-1.632 1.199,-1.486 1.024,-1.406 0.849,-1.327 0.771,-1.37 0.753,-1.378 0.733,-1.387 0.712,-1.394 0.689,-1.4 0.666,-1.405 0.644,-1.409 0.622,-1.412 0.602,-1.413 0.512,-1.413 0.402,-1.348 0.292,-1.283 0.292,-1.072 0.402,-1.007 0.512,-0.942 0.586,-0.942 0.602,-0.942 0.62,-0.943 0.639,-0.945 0.658,-0.948 0.677,-0.95 0.696,-0.954 0.713,-0.957 0.728,-0.961 0.795,-0.981 0.858,-1.073 0.922,-1.165 0.899,-1.218 0.876,-1.272 1.053,-1.352 1.23,-1.432 1.34,-1.385 1.45,-1.338 1.559,-1.392 1.668,-1.446 1.668,-1.651
  Top Layer region: 10.548,-1.68 10.496,-1.727 10.231,-1.727 10.181,-1.689 10.131,-1.651 10.131,-1.446 10.24,-1.392 10.349,-1.338 10.459,-1.385 10.569,-1.432 10.745,-1.352 10.922,-1.272 10.877,-1.165 10.941,-1.072 10.955,-1.053 10.97,-1.034 10.986,-1.017 11.001,-1.001 11.017,-0.988 11.032,-0.976 11.046,-0.968 11.058,-0.963 11.07,-0.96 11.085,-0.956 11.102,-0.953 11.121,-0.951 11.141,-0.948 11.16,-0.947 11.18,-0.945 11.199,-0.944 11.287,-0.942 11.397,-1.007 11.507,-1.072 11.507,-1.283 11.397,-1.348 11.287,-1.413 11.196,-1.413 11.177,-1.412 11.155,-1.409 11.133,-1.406 11.11,-1.4 11.087,-1.394 11.066,-1.387 11.046,-1.379 11.029,-1.371 10.952,-1.328 10.776,-1.402 10.6,-1.477 10.6,-1.632
  Top Layer region: 2.763,-1.163 2.654,-1.132 2.545,-1.101 2.52,-1.024 2.494,-0.946 2.547,-0.819 2.629,-0.8 2.71,-0.781 2.71,-0.44 2.654,-0.44 2.641,-0.438 2.626,-0.435 2.61,-0.429 2.592,-0.421 2.574,-0.412 2.556,-0.401 2.538,-0.389 2.522,-0.376 2.446,-0.313 2.446,-0.126 2.522,-0.063 2.598,0 2.877,0 3.043,-0.126 3.043,-0.3 2.979,-0.37 2.914,-0.44 2.793,-0.44 2.793,-0.785 2.834,-0.785 2.844,-0.786 2.855,-0.791 2.868,-0.798 2.882,-0.807 2.897,-0.819 2.913,-0.832 2.927,-0.846 2.942,-0.862 3.009,-0.939 2.954,-1.069 2.858,-1.116
  Top Layer region: 9.036,-1.163 8.94,-1.116 8.845,-1.069 8.79,-0.939 8.857,-0.862 8.886,-0.832 8.916,-0.807 8.943,-0.791 8.964,-0.785 9.005,-0.785 9.005,-0.44 8.885,-0.44 8.755,-0.3 8.755,-0.126 8.838,-0.063 8.922,0 9.201,0 9.277,-0.063 9.353,-0.126 9.353,-0.313 9.277,-0.376 9.26,-0.389 9.243,-0.401 9.225,-0.412 9.207,-0.421 9.189,-0.429 9.172,-0.435 9.158,-0.438 9.145,-0.44 9.089,-0.44 9.089,-0.781 9.172,-0.801 9.255,-0.82 9.28,-0.895 9.305,-0.969 9.276,-1.036 9.248,-1.102
LED-TH_BD3.0-P2.54-RD-GREEN [mil]
  round 60 hole 35.43: 1(-50,0) 2(50,0)
  silkscreen extent -50,-64 50,64
PDIP-16_L19.7-W6.6-P2.54-LS7.6-BL [mm]
  rect 1.7x1.7 hole 1: 1(-8.89,-3.81)
  round 1.7 hole 1: 2(-6.35,-3.81) 3(-3.81,-3.81) 4(-1.27,-3.81) 5(1.27,-3.81) 6(3.81,-3.81) 7(6.35,-3.81) 8(8.89,-3.81) 9(8.89,3.81) 10(6.35,3.81) 11(3.81,3.81) 12(1.27,3.81) 13(-1.27,3.81) 14(-3.81,3.81) 15(-6.35,3.81) 16(-8.89,3.81)
  silkscreen extent -10.46,-4.26 10,3.2
RES-TH_BD3.0-L9.5-P13.50-D0.6 [mm]
  round 1.88 hole 1: 1(-6.75,0) 2(6.75,0)
  silkscreen extent -4.75,-1.5 4.75,1.5

## Free pads (board coordinates)
  round 2.032 hole 2.032 unplated: ""(41.408,93.726) ""(41.662,41.148) ""(133.61,41.275) ""(133.737,93.726)

## Via types
v1: diameter 0.61, hole 0.305, Top Layer to Bottom Layer, 16 vias

## Nets (pads, with @x,y where several pads share a name; then routed paths per layer and width w, separated by ;. In a path a pad name is that pad's centre, name@x,y a point inside that pad or via, vN(x,y) a via of type N, cw(c..) or ccw(c..) an arc to the next point about the centre after c; other vN are vias at no path point)
+5V: ALIMENTACAO.1 ALIMENTACAO.2 C1.1 C2.1 U1.16 U2.16 | length 104.2
  Top Layer w0.6: C1.1 53.976,83.693 U1.16 57.738,87.456 91.741,87.456 U2.16 ; C2.1 87.504,78.994 U2.16 ; v1(111.475,81.914) 97.283,81.914 U2.16
  Bottom Layer w0.6: v1(111.475,81.914) 120.905,81.914 ALIMENTACAO.2 ALIMENTACAO.1
GND: ALIMENTACAO.3 ALIMENTACAO.4 C1.2 C2.2 R1.2 R2.2 R3.2 R4.2 R5.2 R6.2 R7.2 R8.2 U1.1 U1.2 U1.8 U2.1 U2.2 U2.8 | length 138.7
  Top Layer w0.6: C1.2 53.031,78.613 54.048,77.596 U1.1 ; R3.2 R5.2 76.067,71.387 76.073,71.393 86.233,71.393 86.596,71.03 96.03,71.03 96.393,71.393 105.41,71.393 R8.2@115.57,71.393 ; U2.1 U2.2 ; v1(124.153,72.081) 126.24,74.168 ALIMENTACAO.3
  Bottom Layer w0.6: R1.2@46.228,71.393 46.228,77.216 C1.2 ; U1.1 55.499,76.145 55.954,76.145 56.271,75.828 ; R3.2 56.271,75.828 ; U1.2 56.271,75.828 ; U1.8 73.279,74.187 R2.2@76.073,71.393 ; C2.2 92.402,78.159 92.402,77.723 U2.1 ; R6.2@96.393,71.393 U2.2 ; U2.8 111.633,75.33 115.57,71.393 116.258,72.081 v1(124.153,72.081) ; ALIMENTACAO.3 ALIMENTACAO.4
LED1_1: OUT_B7.1 R1.1 | length 12.5
  Bottom Layer w0.6: R1.1@46.228,57.893 52.813,51.308 OUT_B7.1
LED2_1: OUT_B6.1 R2.1 | length 15.1
  Bottom Layer w0.6: OUT_B6.1 70.146,57.893 R2.1@76.073,57.893
LED3_1: OUT_B5.1 R3.1 | length 17.7
  Top Layer w0.6: R3.1 59.92,54.238 68.485,54.238 OUT_B5.1
LED4_1: OUT_B4.1 R4.1 | length 13.1
  Bottom Layer w0.6: OUT_B4.1 80.239,50.104 81.959,50.104 86.233,54.378 R4.1@86.233,57.893
R5_1: OUT_B3.1 R5.1 | length 22.8
  Top Layer w0.6: R5.1 69.407,57.887 72.252,55.041 82.922,55.041 OUT_B3.1
R6_1: OUT_B2.1 R6.1 | length 7.4
  Bottom Layer w0.6: OUT_B2.1 94.158,55.658 R6.1@96.393,57.893
R7_1: OUT_B1.1 R7.1 | length 7.9
  Bottom Layer w0.6: OUT_B1.1 105.41,54.483 R7.1@105.41,57.893
R8_1: OUT_B0.1 R8.1 | length 8.7
  Bottom Layer w0.6: OUT_B0.1 110.363,52.686 R8.1@115.57,57.893
S$31: 
S$33: 
S$35: 
U1_3: OUT2.4 OUT_B7.2 U1.3 | length 39.8
  Top Layer w0.6: OUT_B7.2 61.559,48.296 v1(64.383,48.296)
  Bottom Layer w0.6: OUT_B7.2 58.547,63.694 60.579,65.726 U1.3 ; v1(64.383,48.296) 65.913,46.766 OUT2.4
U1_4: OUT2.3 OUT_B6.2 U1.4 | length 39.2
  Top Layer w0.6: U1.4 63.119,75.191 v1(63.833,74.477)
  Bottom Layer w0.6: OUT2.3 63.373,50.16 ; v1(63.833,74.477) 63.833,66.308 62.29,64.765 62.29,50.972 63.102,50.16 63.373,50.16 ; OUT_B6.2 64.953,50.16 63.373,50.16
U1_5: OUT2.2 OUT_B5.2 U1.5 | length 50.8
  Top Layer w0.6: v1(60.833,55.076) 70.187,55.076 OUT_B5.2
  Bottom Layer w0.6: OUT2.2 v1(60.833,55.076) 60.833,64.443 61.636,65.246 61.636,73.573 U1.5
U1_6: OUT2.1 OUT_B4.2 U1.6 | length 57.5
  Bottom Layer w0.6: OUT2.1 59.596,42.004 66.957,42.004 77.771,52.819 ; U1.6 68.199,73.888 77.771,64.315 77.771,52.819 ; OUT_B4.2 80.064,52.819 77.771,52.819
U1_7: SINAIS_IN.1 U1.7 U2.7 | length 63.4
  Top Layer w0.6: U1.7 73.305,75.03 106.4,75.03 U2.7 ; v1(116.618,79.629) SINAIS_IN.1
  Bottom Layer w0.6: U2.7 110.999,79.629 v1(116.618,79.629)
U1_9: SINAIS_IN.2 U1.9 U1.10 U2.9 U2.10 | length 63.8
  Top Layer w0.6: U1.10 U1.9 ; U2.10 U2.9 114.807,82.169 SINAIS_IN.2
  Bottom Layer w0.6: U1.9 75.821,87.758 106.678,87.758 U2.10
U1_11: BUS2.1 U1.11 | length 80.7
  Top Layer w0.6: v1(103.443,58.933) 103.443,56.456 104.883,55.016 122.78,55.016 129.789,48.006 BUS2.1
  Bottom Layer w0.6: U1.11 69.617,83.799 79.424,83.799 89.776,73.447 90.284,73.447 103.443,60.288 v1(103.443,58.933)
U1_12: BUS2.2 U1.12 | length 80.8
  Top Layer w0.6: v1(104.399,56.671) 104.695,56.375 125.362,56.375 BUS2.2
  Bottom Layer w0.6: U1.12 68.281,82.594 79.493,82.594 89.444,72.644 89.952,72.644 102.429,60.167 102.429,58.641 v1(104.399,56.671)
U1_13: BUS2.3 U1.13 | length 86.3
  Top Layer w0.6: v1(84.474,60.058) 124.219,60.058 BUS2.3
  Bottom Layer w0.6: U1.13 66.544,81.791 71.082,81.791 84.474,68.399 v1(84.474,60.058)
U1_14: BUS2.4 U1.14 | length 100
  Top Layer w0.6: v1(59.61,65.985) 120.832,65.985 BUS2.4
  Bottom Layer w0.6: v1(59.61,65.985) 54.147,71.448 54.147,78.784 U1.14
U1_15: SINAIS_IN.3 U1.15 U2.15 | length 76
  Top Layer w0.6: U1.15 59.475,86.653 89.738,86.653 v1(89.859,86.532) ; U2.15 97.859,86.809 129.091,86.809 SINAIS_IN.3
  Bottom Layer w0.6: v1(89.859,86.532) 90.136,86.809 94.927,86.809 U2.15
U2_3: OUT1.4 OUT_B3.2 U2.3 | length 79.5
  Top Layer w0.6: v1(85.108,75.838) 97.047,75.838 U2.3
  Bottom Layer w0.6: OUT1.4 57.477,41.202 78.855,41.202 OUT_B3.2 89.078,70.739 85.108,74.709 v1(85.108,75.838)
U2_4: OUT1.3 OUT_B2.2 U2.4 | length 85.9
  Top Layer w0.6: OUT1.3 54.134,44.609 89.703,44.609 v1(89.793,44.52) ; v1(89.618,71.837) 91.773,73.992 v1(97.741,73.992)
  Bottom Layer w0.6: v1(89.618,71.837) 97.899,63.555 97.899,52.627 OUT_B2.2 v1(89.793,44.52) ; v1(97.741,73.992) U2.4
U2_5: OUT1.2 OUT_B1.2 U2.5 | length 86.4
  Top Layer w0.6: OUT1.2 52.397,45.412 v1(98.879,45.412)
  Bottom Layer w0.6: v1(98.879,45.412) OUT_B1.2 106.981,53.514 106.981,74.756 U2.5
U2_6: OUT1.1 OUT_B0.2 U2.6 | length 101.2
  Top Layer w0.6: OUT1.1 51.002,46.557 108.152,46.557 OUT_B0.2
  Bottom Layer w0.6: U2.6 107.953,76.324 107.953,51.816 109.768,50 111.595,50 OUT_B0.2
U2_11: BUS1.1 U2.11 | length 59.4
  Bottom Layer w0.6: U2.11 107.971,83.926 113.291,83.926 117.975,88.61 131.784,88.61 133.431,86.963 133.431,60.787 BUS1.1
U2_12: BUS1.2 U2.12 | length 48.6
  Bottom Layer w0.6: U2.12 106.258,83.099 125.116,83.099 129.888,78.326 131.445,78.326 132.546,77.225 132.546,62.442 BUS1.2
U2_13: BUS1.3 U2.13 | length 38.7
  Top Layer w0.6: U2.13 103.292,83.524 111.294,83.524 BUS1.3
U2_14: BUS1.4 U2.14 | length 40.3
  Bottom Layer w0.6: U2.14 103.17,81.107 116.452,81.107 131.191,66.368 BUS1.4
U4_4: SINAIS_IN.4

## Silkscreen, mask and mechanical layers (free items; w line width, h text height)
Top Overlay:
  text "OUTPUT REGISTER" at 62.484,88.353 h4.14
  text "NULL" at 118.237,85.915 h1.14
  text "RESERT" at 118.237,83.502 h1.14
  text "/OPR_IN" at 118.364,81.216 h1.14
  text "CLOCK" at 118.364,79.057 h1.14
  text "GND LOOP" at 118.237,75.501 h1.14
  text "GND" at 118.237,73.088 h1.14
  text "+5VCC" at 118.364,70.549 h1.14
  text "+5VCC LOOP" at 118.364,68.135 h1.14
  text "BUS7" at 118.364,64.453 h1.14
  text "BUS6" at 118.364,62.039 h1.14
  text "BUS5" at 118.364,59.753 h1.14
  text "BUS4" at 118.243,57.213 h1.14
  text "BUS3" at 118.237,54.419 h1.14
  text "BUS2" at 118.254,52.006 h1.14
  text "BUS1" at 118.26,49.466 h1.14
  text "BUS0" at 118.254,47.053 h1.14
  text "OUT1" at 72.263,45.657 h1.14
  text "OUT2" at 84.455,45.657 h1.14
  text "1 - out_b0" at 69.723,43.878 h1.14
  text "1 - out_b4" at 82.55,43.878 h1.14
  text "2 - out_b1" at 69.342,42.1 h1.14
  text "2 - out_b5" at 82.169,42.1 h1.14
  text "3 - out_b2" at 69.342,40.45 h1.14
  text "3 - out_b6" at 82.169,40.45 h1.14
  text "4 - out_b3" at 69.342,38.798 h1.14
  text "4 - out_b7" at 82.169,38.798 h1.14
Document:
  lines w0.003: 87.668,67.348 87.719,67.399